# EAGLE board SubstrateConnector (EAGLE 5.10)
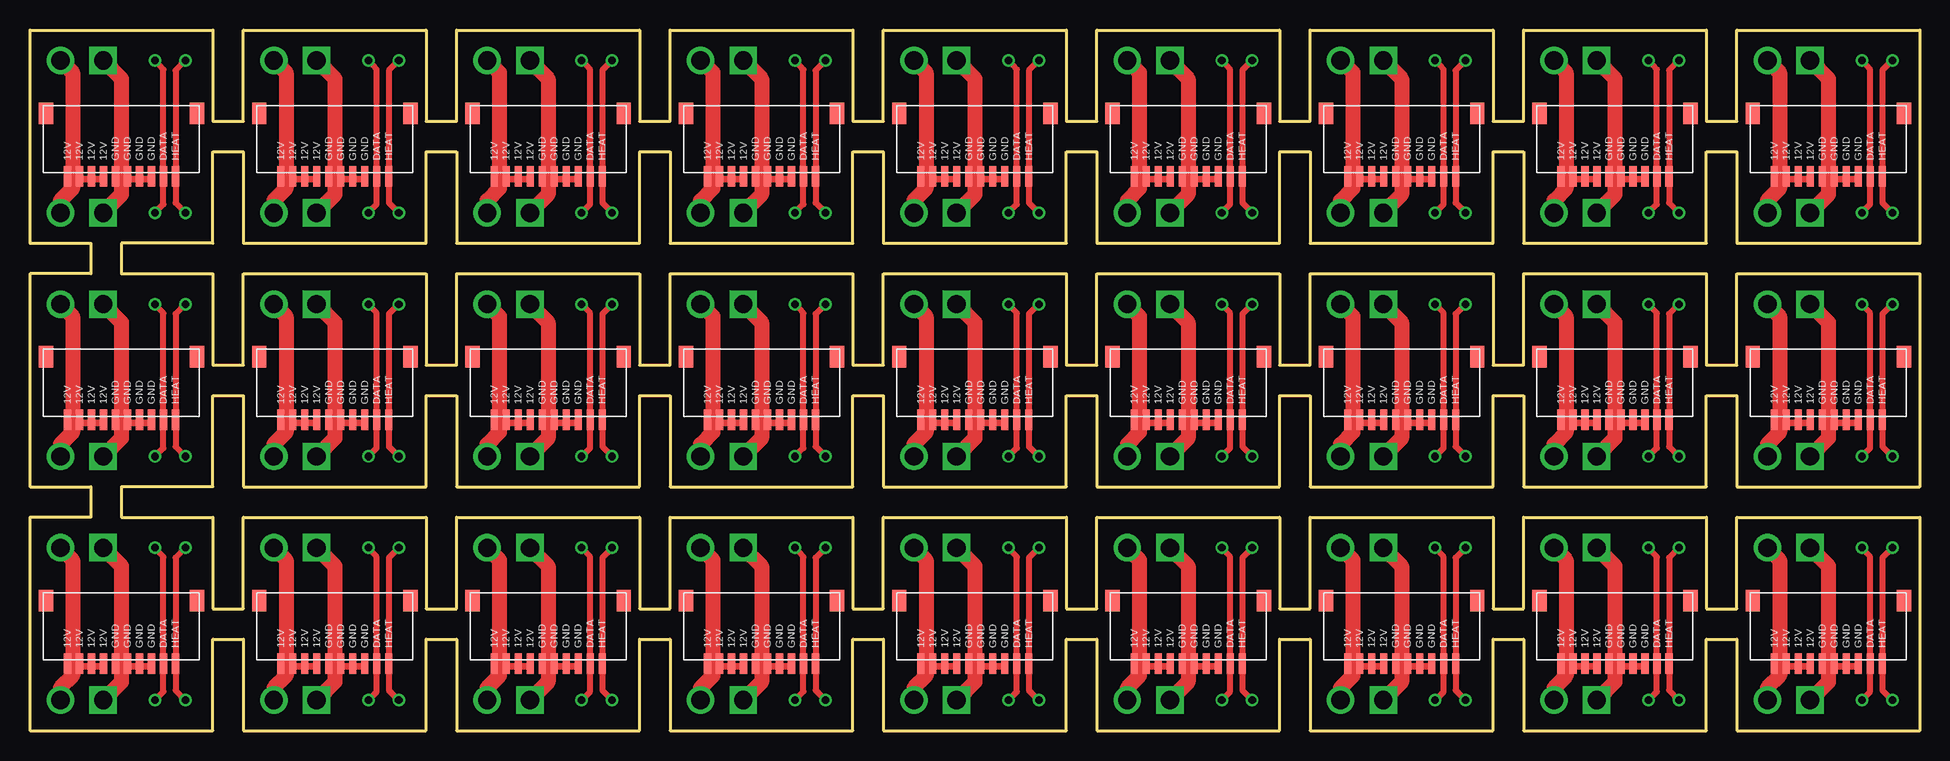
[diagram p0: board, top side]

Size 157.48 x 58.42 mm. Coordinates in mm from the lower left corner, seen from the top.
Outline: 0,0 0,17.78 5.08,17.78 5.08,20.32 0,20.32 0,38.1 5.08,38.1 5.08,40.64 0,40.64 0,58.42 15.24,58.42 15.24,50.8 17.78,50.8 17.78,58.42 33.02,58.42 33.02,50.8 35.56,50.8 35.56,58.42 50.8,58.42 50.8,50.8 53.34,50.8 53.34,58.42 68.58,58.42 68.58,50.8 71.12,50.8 71.12,58.42 86.36,58.42 86.36,50.8 88.9,50.8 88.9,58.42 104.14,58.42 104.14,50.8 106.68,50.8 106.68,58.42 121.92,58.42 121.92,50.8 124.46,50.8 124.46,58.42 139.7,58.42 139.7,50.8 142.24,50.8 142.24,58.42 157.48,58.42 157.48,40.64 142.24,40.64 142.24,48.26 139.7,48.26 139.7,40.64 124.46,40.64 124.46,48.26 121.92,48.26 121.92,40.64 106.68,40.64 106.68,48.26 104.14,48.26 104.14,40.64 88.9,40.64 88.9,48.26 86.36,48.26 86.36,40.64 71.12,40.64 71.12,48.26 68.58,48.26 68.58,40.64 53.34,40.64 53.34,48.26 50.8,48.26 50.8,40.64 35.56,40.64 35.56,48.26 33.02,48.26 33.02,40.64 17.78,40.64 17.78,48.26 15.24,48.26 15.24,40.64 7.62,40.64 7.62,38.1 15.24,38.1 15.24,30.48 17.78,30.48 17.78,38.1 33.02,38.1 33.02,30.48 35.56,30.48 35.56,38.1 50.8,38.1 50.8,30.48 53.34,30.48 53.34,38.1 68.58,38.1 68.58,30.48 71.12,30.48 71.12,38.1 86.36,38.1 86.36,30.48 88.9,30.48 88.9,38.1 104.14,38.1 104.14,30.48 106.68,30.48 106.68,38.1 121.92,38.1 121.92,30.48 124.46,30.48 124.46,38.1 139.7,38.1 139.7,30.48 142.24,30.48 142.24,38.1 157.48,38.1 157.48,20.32 142.24,20.32 142.24,27.94 139.7,27.94 139.7,20.32 124.46,20.32 124.46,27.94 121.92,27.94 121.92,20.32 106.68,20.32 106.68,27.94 104.14,27.94 104.14,20.32 88.9,20.32 88.9,27.94 86.36,27.94 86.36,20.32 71.12,20.32 71.12,27.94 68.58,27.94 68.58,20.32 53.34,20.32 53.34,27.94 50.8,27.94 50.8,20.32 35.56,20.32 35.56,27.94 33.02,27.94 33.02,20.32 17.78,20.32 17.78,27.94 15.24,27.94 15.24,20.32 7.62,20.32 7.62,17.78 15.24,17.78 15.24,10.16 17.78,10.16 17.78,17.78 33.02,17.78 33.02,10.16 35.56,10.16 35.56,17.78 50.8,17.78 50.8,10.16 53.34,10.16 53.34,17.78 68.58,17.78 68.58,10.16 71.12,10.16 71.12,17.78 86.36,17.78 86.36,10.16 88.9,10.16 88.9,17.78 104.14,17.78 104.14,10.16 106.68,10.16 106.68,17.78 121.92,17.78 121.92,10.16 124.46,10.16 124.46,17.78 139.7,17.78 139.7,10.16 142.24,10.16 142.24,17.78 157.48,17.78 157.48,0 142.24,0 142.24,7.62 139.7,7.62 139.7,0 124.46,0 124.46,7.62 121.92,7.62 121.92,0 106.68,0 106.68,7.62 104.14,7.62 104.14,0 88.9,0 88.9,7.62 86.36,7.62 86.36,0 71.12,0 71.12,7.62 68.58,7.62 68.58,0 53.34,0 53.34,7.62 50.8,7.62 50.8,0 35.56,0 35.56,7.62 33.02,7.62 33.02,0 17.78,0 17.78,7.62 15.24,7.62 15.24,0 0,0
Copper layers (1*16): Top 0.035mm / dielectric 1.5mm / Bottom 0.035mm
Design rules "default": minimum track width 10mil, minimum drill 24mil, track to track 8mil, track to pad 8mil, pad to pad 8mil, via to via 8mil, smd to smd 8mil, copper to edge 40mil, drill to drill 8mil, minimum pad ring 10mil, minimum via ring 8mil, stop-mask expansion 4mil, vias tented up to drill 0mil, thermal gap 10mil

## Footprints (pad centres in the part's own frame; a part is rotated, then mirrored left to right if it is on the bottom)
FACE_BOARD_CONNECTOR = smd 0.6 x 1.7: P$1 -3.5,0; P$2 -2.5,0; P$3 -1.5,0; P$4 -0.5,0; P$5 -4.5,0; P$6 0.5,0; P$7 1.5,0; P$8 2.5,0; P$9 3.5,0; P$12 4.5,0 | smd 1.2 x 1.8: P$10 -6.3,-5.25; P$11 6.3,-5.25

## Placement (x,y rotation side)
E$1  [FACE_BOARD_CONNECTOR]  7.62,5.59 180 top
E$2  [FACE_BOARD_CONNECTOR]  25.4,5.59 180 top
E$3  [FACE_BOARD_CONNECTOR]  43.18,5.59 180 top
E$4  [FACE_BOARD_CONNECTOR]  60.96,5.59 180 top
E$5  [FACE_BOARD_CONNECTOR]  78.74,5.59 180 top
E$6  [FACE_BOARD_CONNECTOR]  96.52,5.59 180 top
E$7  [FACE_BOARD_CONNECTOR]  114.3,5.59 180 top
E$8  [FACE_BOARD_CONNECTOR]  132.08,5.59 180 top
E$9  [FACE_BOARD_CONNECTOR]  149.86,5.59 180 top
E$10  [FACE_BOARD_CONNECTOR]  7.62,25.91 180 top
E$11  [FACE_BOARD_CONNECTOR]  25.4,25.91 180 top
E$12  [FACE_BOARD_CONNECTOR]  43.18,25.91 180 top
E$13  [FACE_BOARD_CONNECTOR]  60.96,25.91 180 top
E$14  [FACE_BOARD_CONNECTOR]  78.74,25.91 180 top
E$15  [FACE_BOARD_CONNECTOR]  96.52,25.91 180 top
E$16  [FACE_BOARD_CONNECTOR]  114.3,25.91 180 top
E$17  [FACE_BOARD_CONNECTOR]  132.08,25.91 180 top
E$18  [FACE_BOARD_CONNECTOR]  149.86,25.91 180 top
E$19  [FACE_BOARD_CONNECTOR]  7.62,46.23 180 top
E$20  [FACE_BOARD_CONNECTOR]  25.4,46.23 180 top
E$21  [FACE_BOARD_CONNECTOR]  43.18,46.23 180 top
E$22  [FACE_BOARD_CONNECTOR]  60.96,46.23 180 top
E$23  [FACE_BOARD_CONNECTOR]  78.74,46.23 180 top
E$24  [FACE_BOARD_CONNECTOR]  96.52,46.23 180 top
E$25  [FACE_BOARD_CONNECTOR]  114.3,46.23 180 top
E$26  [FACE_BOARD_CONNECTOR]  132.08,46.23 180 top
E$27  [FACE_BOARD_CONNECTOR]  149.86,46.23 180 top

## Library data of the parts
E$1-E$27 = Connectors

## Tracks (layer width: path | path; a pad name or v marks a point on that pad's centre or on a via)
S$1  (via drill 1.52)
  Top 1.27: v23.88,15.24 25.4,13.72 25.4,4.06 v23.88,2.54
S$2  (via drill 0.64)
  Top 0.508: v12.95,2.54 12.13,3.37 12.13,14.41 v12.95,15.24
S$3  (via drill 1.52)
  Top 1.27: v6.1,15.24 7.62,13.72 7.62,4.06 v6.1,2.54
S$4  (via drill 1.52)
  Top 1.27: v2.54,15.24 3.56,14.22 3.56,4.57 2.54,3.56 v2.54,2.54
S$5  (via drill 0.64)
  Top 0.508: v10.41,2.54 11.11,3.24 11.11,14.48 v10.41,15.24
S$6  (via drill 1.52)
  Top 1.27: v20.32,15.24 21.34,14.22 21.34,4.57 20.32,3.56 v20.32,2.54
S$7  (via drill 0.64)
  Top 0.508: v30.73,2.54 29.91,3.37 29.91,14.41 v30.73,15.24
S$8  (via drill 0.64)
  Top 0.508: v28.19,2.54 28.89,3.24 28.89,14.48 v28.19,15.24
S$9  (via drill 1.52)
  Top 1.27: v41.66,15.24 43.18,13.72 43.18,4.06 v41.66,2.54
S$10  (via drill 1.52)
  Top 1.27: v38.1,15.24 39.12,14.22 39.12,4.57 38.1,3.56 v38.1,2.54
S$11  (via drill 0.64)
  Top 0.508: v48.51,2.54 47.69,3.37 47.69,14.41 v48.51,15.24
S$12  (via drill 0.64)
  Top 0.508: v45.97,2.54 46.67,3.24 46.67,14.48 v45.97,15.24
S$13  (via drill 1.52)
  Top 1.27: v59.44,15.24 60.96,13.72 60.96,4.06 v59.44,2.54
S$14  (via drill 1.52)
  Top 1.27: v55.88,15.24 56.9,14.22 56.9,4.57 55.88,3.56 v55.88,2.54
S$15  (via drill 0.64)
  Top 0.508: v66.29,2.54 65.47,3.37 65.47,14.41 v66.29,15.24
S$16  (via drill 0.64)
  Top 0.508: v63.75,2.54 64.45,3.24 64.45,14.48 v63.75,15.24
S$17  (via drill 1.52)
  Top 1.27: v77.22,15.24 78.74,13.72 78.74,4.06 v77.22,2.54
S$18  (via drill 1.52)
  Top 1.27: v73.66,15.24 74.68,14.22 74.68,4.57 73.66,3.56 v73.66,2.54
S$19  (via drill 0.64)
  Top 0.508: v84.07,2.54 83.25,3.37 83.25,14.41 v84.07,15.24
S$20  (via drill 0.64)
  Top 0.508: v81.53,2.54 82.23,3.24 82.23,14.48 v81.53,15.24
S$21  (via drill 1.52)
  Top 1.27: v95,15.24 96.52,13.72 96.52,4.06 v95,2.54
S$22  (via drill 1.52)
  Top 1.27: v91.44,15.24 92.46,14.22 92.46,4.57 91.44,3.56 v91.44,2.54
S$23  (via drill 0.64)
  Top 0.508: v101.85,2.54 101.03,3.37 101.03,14.41 v101.85,15.24
S$24  (via drill 0.64)
  Top 0.508: v99.31,2.54 100.01,3.24 100.01,14.48 v99.31,15.24
S$25  (via drill 1.52)
  Top 1.27: v112.78,15.24 114.3,13.72 114.3,4.06 v112.78,2.54
S$26  (via drill 1.52)
  Top 1.27: v109.22,15.24 110.24,14.22 110.24,4.57 109.22,3.56 v109.22,2.54
S$27  (via drill 0.64)
  Top 0.508: v119.63,2.54 118.81,3.37 118.81,14.41 v119.63,15.24
S$28  (via drill 0.64)
  Top 0.508: v117.09,2.54 117.79,3.24 117.79,14.48 v117.09,15.24
S$29  (via drill 1.52)
  Top 1.27: v130.56,15.24 132.08,13.72 132.08,4.06 v130.56,2.54
S$30  (via drill 1.52)
  Top 1.27: v127,15.24 128.02,14.22 128.02,4.57 127,3.56 v127,2.54
S$31  (via drill 0.64)
  Top 0.508: v137.41,2.54 136.59,3.37 136.59,14.41 v137.41,15.24
S$32  (via drill 0.64)
  Top 0.508: v134.87,2.54 135.57,3.24 135.57,14.48 v134.87,15.24
S$33  (via drill 1.52)
  Top 1.27: v148.34,15.24 149.86,13.72 149.86,4.06 v148.34,2.54
S$34  (via drill 1.52)
  Top 1.27: v144.78,15.24 145.8,14.22 145.8,4.57 144.78,3.56 v144.78,2.54
S$35  (via drill 0.64)
  Top 0.508: v155.19,2.54 154.37,3.37 154.37,14.41 v155.19,15.24
S$36  (via drill 0.64)
  Top 0.508: v152.65,2.54 153.35,3.24 153.35,14.48 v152.65,15.24
S$37  (via drill 1.52)
  Top 1.27: v6.1,35.56 7.62,34.04 7.62,24.38 v6.1,22.86
S$38  (via drill 1.52)
  Top 1.27: v2.54,35.56 3.56,34.54 3.56,24.89 2.54,23.88 v2.54,22.86
S$39  (via drill 0.64)
  Top 0.508: v12.95,22.86 12.13,23.69 12.13,34.73 v12.95,35.56
S$40  (via drill 0.64)
  Top 0.508: v10.41,22.86 11.11,23.56 11.11,34.8 v10.41,35.56
S$41  (via drill 1.52)
  Top 1.27: v23.88,35.56 25.4,34.04 25.4,24.38 v23.88,22.86
S$42  (via drill 1.52)
  Top 1.27: v20.32,35.56 21.34,34.54 21.34,24.89 20.32,23.88 v20.32,22.86
S$43  (via drill 0.64)
  Top 0.508: v30.73,22.86 29.91,23.69 29.91,34.73 v30.73,35.56
S$44  (via drill 0.64)
  Top 0.508: v28.19,22.86 28.89,23.56 28.89,34.8 v28.19,35.56
S$45  (via drill 1.52)
  Top 1.27: v41.66,35.56 43.18,34.04 43.18,24.38 v41.66,22.86
S$46  (via drill 1.52)
  Top 1.27: v38.1,35.56 39.12,34.54 39.12,24.89 38.1,23.88 v38.1,22.86
S$47  (via drill 0.64)
  Top 0.508: v48.51,22.86 47.69,23.69 47.69,34.73 v48.51,35.56
S$48  (via drill 0.64)
  Top 0.508: v45.97,22.86 46.67,23.56 46.67,34.8 v45.97,35.56
S$49  (via drill 1.52)
  Top 1.27: v59.44,35.56 60.96,34.04 60.96,24.38 v59.44,22.86
S$50  (via drill 1.52)
  Top 1.27: v55.88,35.56 56.9,34.54 56.9,24.89 55.88,23.88 v55.88,22.86
S$51  (via drill 0.64)
  Top 0.508: v66.29,22.86 65.47,23.69 65.47,34.73 v66.29,35.56
S$52  (via drill 0.64)
  Top 0.508: v63.75,22.86 64.45,23.56 64.45,34.8 v63.75,35.56
S$53  (via drill 1.52)
  Top 1.27: v77.22,35.56 78.74,34.04 78.74,24.38 v77.22,22.86
S$54  (via drill 1.52)
  Top 1.27: v73.66,35.56 74.68,34.54 74.68,24.89 73.66,23.88 v73.66,22.86
S$55  (via drill 0.64)
  Top 0.508: v84.07,22.86 83.25,23.69 83.25,34.73 v84.07,35.56
S$56  (via drill 0.64)
  Top 0.508: v81.53,22.86 82.23,23.56 82.23,34.8 v81.53,35.56
S$57  (via drill 1.52)
  Top 1.27: v95,35.56 96.52,34.04 96.52,24.38 v95,22.86
S$58  (via drill 1.52)
  Top 1.27: v91.44,35.56 92.46,34.54 92.46,24.89 91.44,23.88 v91.44,22.86
S$59  (via drill 0.64)
  Top 0.508: v101.85,22.86 101.03,23.69 101.03,34.73 v101.85,35.56
S$60  (via drill 0.64)
  Top 0.508: v99.31,22.86 100.01,23.56 100.01,34.8 v99.31,35.56
S$61  (via drill 1.52)
  Top 1.27: v112.78,35.56 114.3,34.04 114.3,24.38 v112.78,22.86
S$62  (via drill 1.52)
  Top 1.27: v109.22,35.56 110.24,34.54 110.24,24.89 109.22,23.88 v109.22,22.86
S$63  (via drill 0.64)
  Top 0.508: v119.63,22.86 118.81,23.69 118.81,34.73 v119.63,35.56
S$64  (via drill 0.64)
  Top 0.508: v117.09,22.86 117.79,23.56 117.79,34.8 v117.09,35.56
S$65  (via drill 1.52)
  Top 1.27: v130.56,35.56 132.08,34.04 132.08,24.38 v130.56,22.86
S$66  (via drill 1.52)
  Top 1.27: v127,35.56 128.02,34.54 128.02,24.89 127,23.88 v127,22.86
S$67  (via drill 0.64)
  Top 0.508: v137.41,22.86 136.59,23.69 136.59,34.73 v137.41,35.56
S$68  (via drill 0.64)
  Top 0.508: v134.87,22.86 135.57,23.56 135.57,34.8 v134.87,35.56
S$69  (via drill 1.52)
  Top 1.27: v148.34,35.56 149.86,34.04 149.86,24.38 v148.34,22.86
S$70  (via drill 1.52)
  Top 1.27: v144.78,35.56 145.8,34.54 145.8,24.89 144.78,23.88 v144.78,22.86
S$71  (via drill 0.64)
  Top 0.508: v155.19,22.86 154.37,23.69 154.37,34.73 v155.19,35.56
S$72  (via drill 0.64)
  Top 0.508: v152.65,22.86 153.35,23.56 153.35,34.8 v152.65,35.56
S$73  (via drill 1.52)
  Top 1.27: v6.1,55.88 7.62,54.36 7.62,44.7 v6.1,43.18
S$74  (via drill 1.52)
  Top 1.27: v2.54,55.88 3.56,54.86 3.56,45.21 2.54,44.2 v2.54,43.18
S$75  (via drill 0.64)
  Top 0.508: v12.95,43.18 12.13,44.01 12.13,55.05 v12.95,55.88
S$76  (via drill 0.64)
  Top 0.508: v10.41,43.18 11.11,43.88 11.11,55.12 v10.41,55.88
S$77  (via drill 1.52)
  Top 1.27: v23.88,55.88 25.4,54.36 25.4,44.7 v23.88,43.18
S$78  (via drill 1.52)
  Top 1.27: v20.32,55.88 21.34,54.86 21.34,45.21 20.32,44.2 v20.32,43.18
S$79  (via drill 0.64)
  Top 0.508: v30.73,43.18 29.91,44.01 29.91,55.05 v30.73,55.88
S$80  (via drill 0.64)
  Top 0.508: v28.19,43.18 28.89,43.88 28.89,55.12 v28.19,55.88
S$81  (via drill 1.52)
  Top 1.27: v41.66,55.88 43.18,54.36 43.18,44.7 v41.66,43.18
S$82  (via drill 1.52)
  Top 1.27: v38.1,55.88 39.12,54.86 39.12,45.21 38.1,44.2 v38.1,43.18
S$83  (via drill 0.64)
  Top 0.508: v48.51,43.18 47.69,44.01 47.69,55.05 v48.51,55.88
S$84  (via drill 0.64)
  Top 0.508: v45.97,43.18 46.67,43.88 46.67,55.12 v45.97,55.88
S$85  (via drill 1.52)
  Top 1.27: v59.44,55.88 60.96,54.36 60.96,44.7 v59.44,43.18
S$86  (via drill 1.52)
  Top 1.27: v55.88,55.88 56.9,54.86 56.9,45.21 55.88,44.2 v55.88,43.18
S$87  (via drill 0.64)
  Top 0.508: v66.29,43.18 65.47,44.01 65.47,55.05 v66.29,55.88
S$88  (via drill 0.64)
  Top 0.508: v63.75,43.18 64.45,43.88 64.45,55.12 v63.75,55.88
S$89  (via drill 1.52)
  Top 1.27: v77.22,55.88 78.74,54.36 78.74,44.7 v77.22,43.18
S$90  (via drill 1.52)
  Top 1.27: v73.66,55.88 74.68,54.86 74.68,45.21 73.66,44.2 v73.66,43.18
S$91  (via drill 0.64)
  Top 0.508: v84.07,43.18 83.25,44.01 83.25,55.05 v84.07,55.88
S$92  (via drill 0.64)
  Top 0.508: v81.53,43.18 82.23,43.88 82.23,55.12 v81.53,55.88
S$93  (via drill 1.52)
  Top 1.27: v95,55.88 96.52,54.36 96.52,44.7 v95,43.18
S$94  (via drill 1.52)
  Top 1.27: v91.44,55.88 92.46,54.86 92.46,45.21 91.44,44.2 v91.44,43.18
S$95  (via drill 0.64)
  Top 0.508: v101.85,43.18 101.03,44.01 101.03,55.05 v101.85,55.88
S$96  (via drill 0.64)
  Top 0.508: v99.31,43.18 100.01,43.88 100.01,55.12 v99.31,55.88
S$97  (via drill 1.52)
  Top 1.27: v112.78,55.88 114.3,54.36 114.3,44.7 v112.78,43.18
S$98  (via drill 1.52)
  Top 1.27: v109.22,55.88 110.24,54.86 110.24,45.21 109.22,44.2 v109.22,43.18
S$99  (via drill 0.64)
  Top 0.508: v119.63,43.18 118.81,44.01 118.81,55.05 v119.63,55.88
S$100  (via drill 0.64)
  Top 0.508: v117.09,43.18 117.79,43.88 117.79,55.12 v117.09,55.88
S$101  (via drill 1.52)
  Top 1.27: v130.56,55.88 132.08,54.36 132.08,44.7 v130.56,43.18
S$102  (via drill 1.52)
  Top 1.27: v127,55.88 128.02,54.86 128.02,45.21 127,44.2 v127,43.18
S$103  (via drill 0.64)
  Top 0.508: v137.41,43.18 136.59,44.01 136.59,55.05 v137.41,55.88
S$104  (via drill 0.64)
  Top 0.508: v134.87,43.18 135.57,43.88 135.57,55.12 v134.87,55.88
S$105  (via drill 1.52)
  Top 1.27: v148.34,55.88 149.86,54.36 149.86,44.7 v148.34,43.18
S$106  (via drill 1.52)
  Top 1.27: v144.78,55.88 145.8,54.86 145.8,45.21 144.78,44.2 v144.78,43.18
S$107  (via drill 0.64)
  Top 0.508: v155.19,43.18 154.37,44.01 154.37,55.05 v155.19,55.88
S$108  (via drill 0.64)
  Top 0.508: v152.65,43.18 153.35,43.88 153.35,55.12 v152.65,55.88